# Altium PCB CatTorretPCB.PcbDoc
Units mm, origin at the board's own origin, x right, y up, seen from the top; angles counter-clockwise.
Board outline 42.8 x 38.73 mm, 2 copper layers (Top Layer, Bottom Layer); 15 components, 13 nets, 57 pads, 0 vias.
Unrouted connection lines stored in the file: 30.
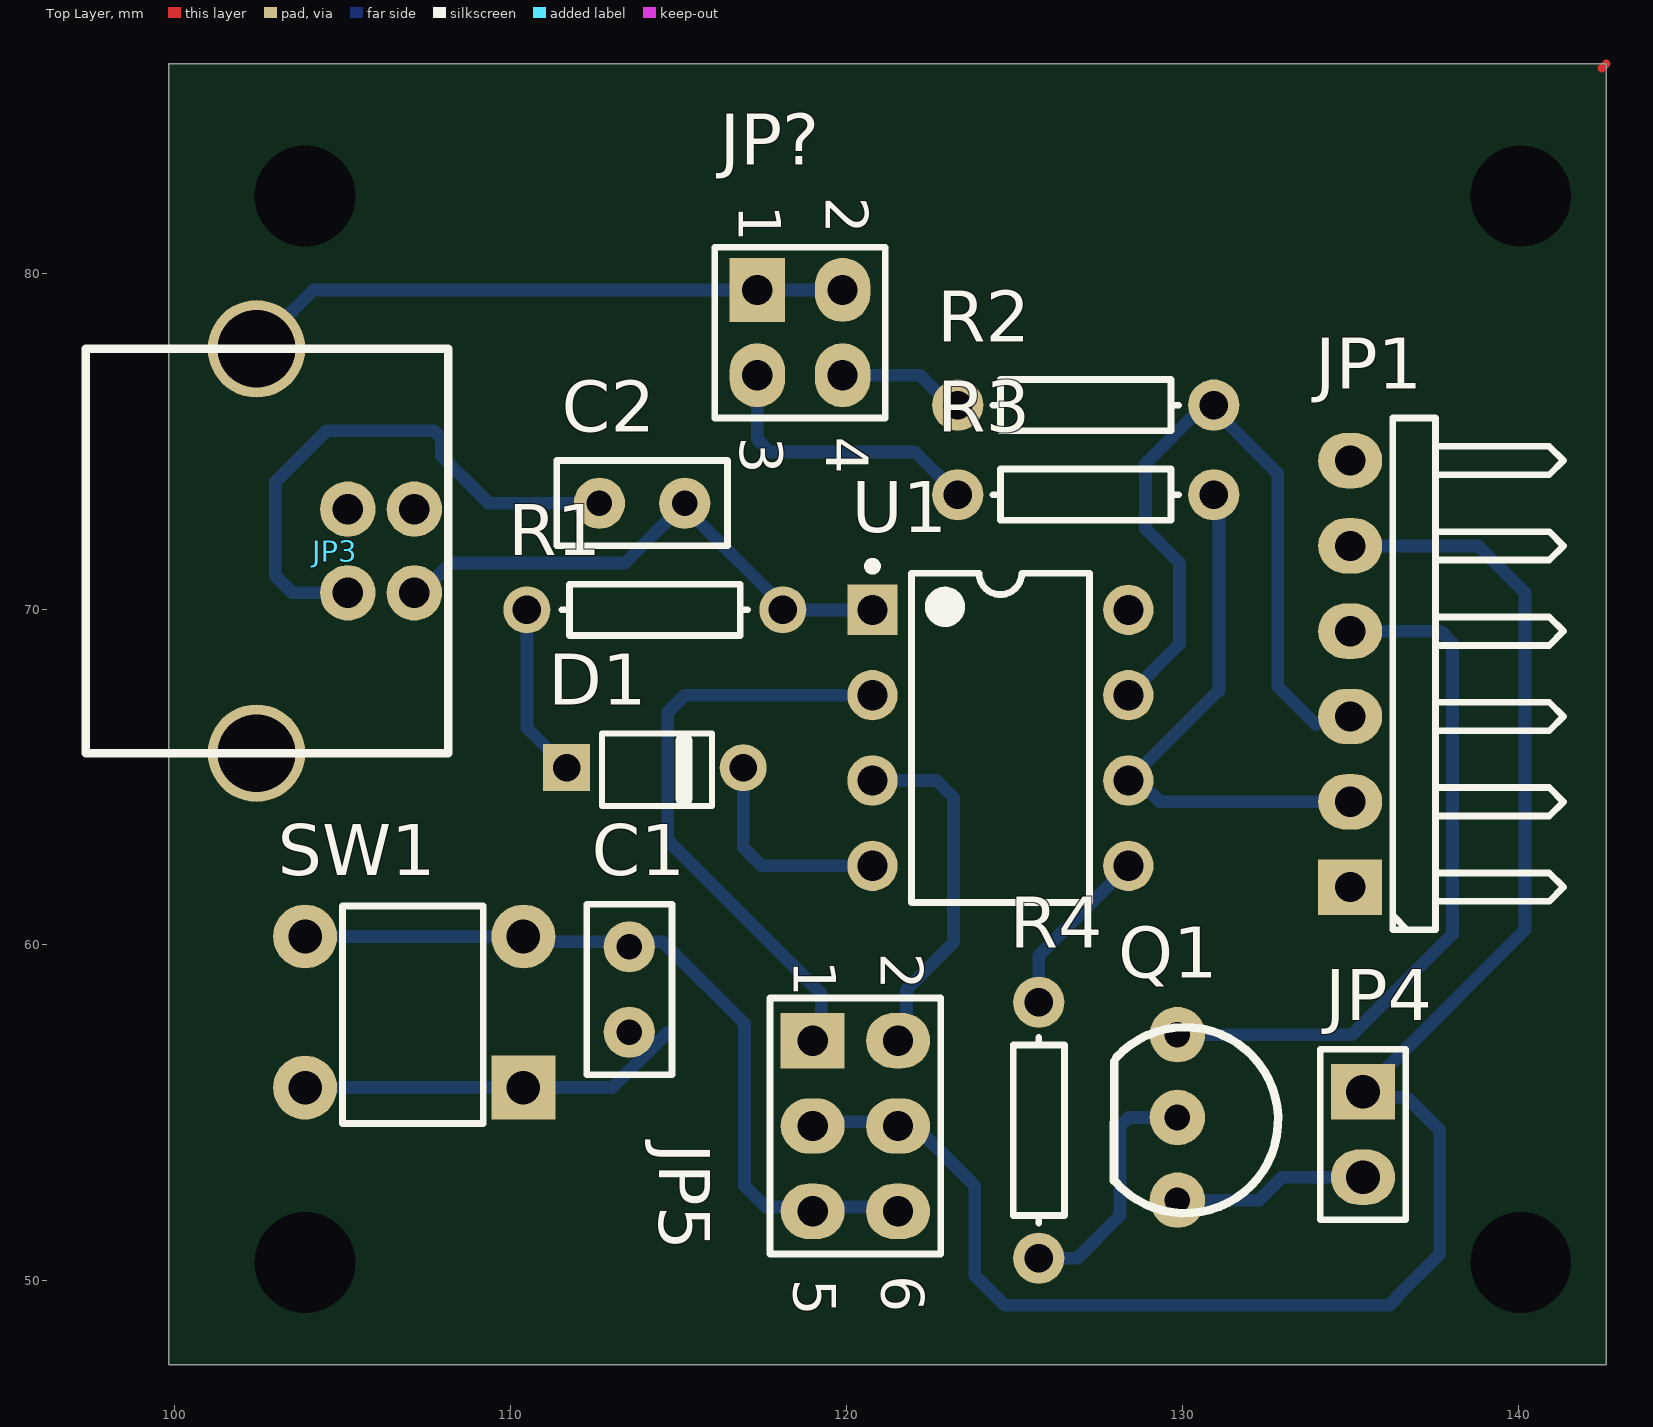
[diagram p0: Top Layer view]
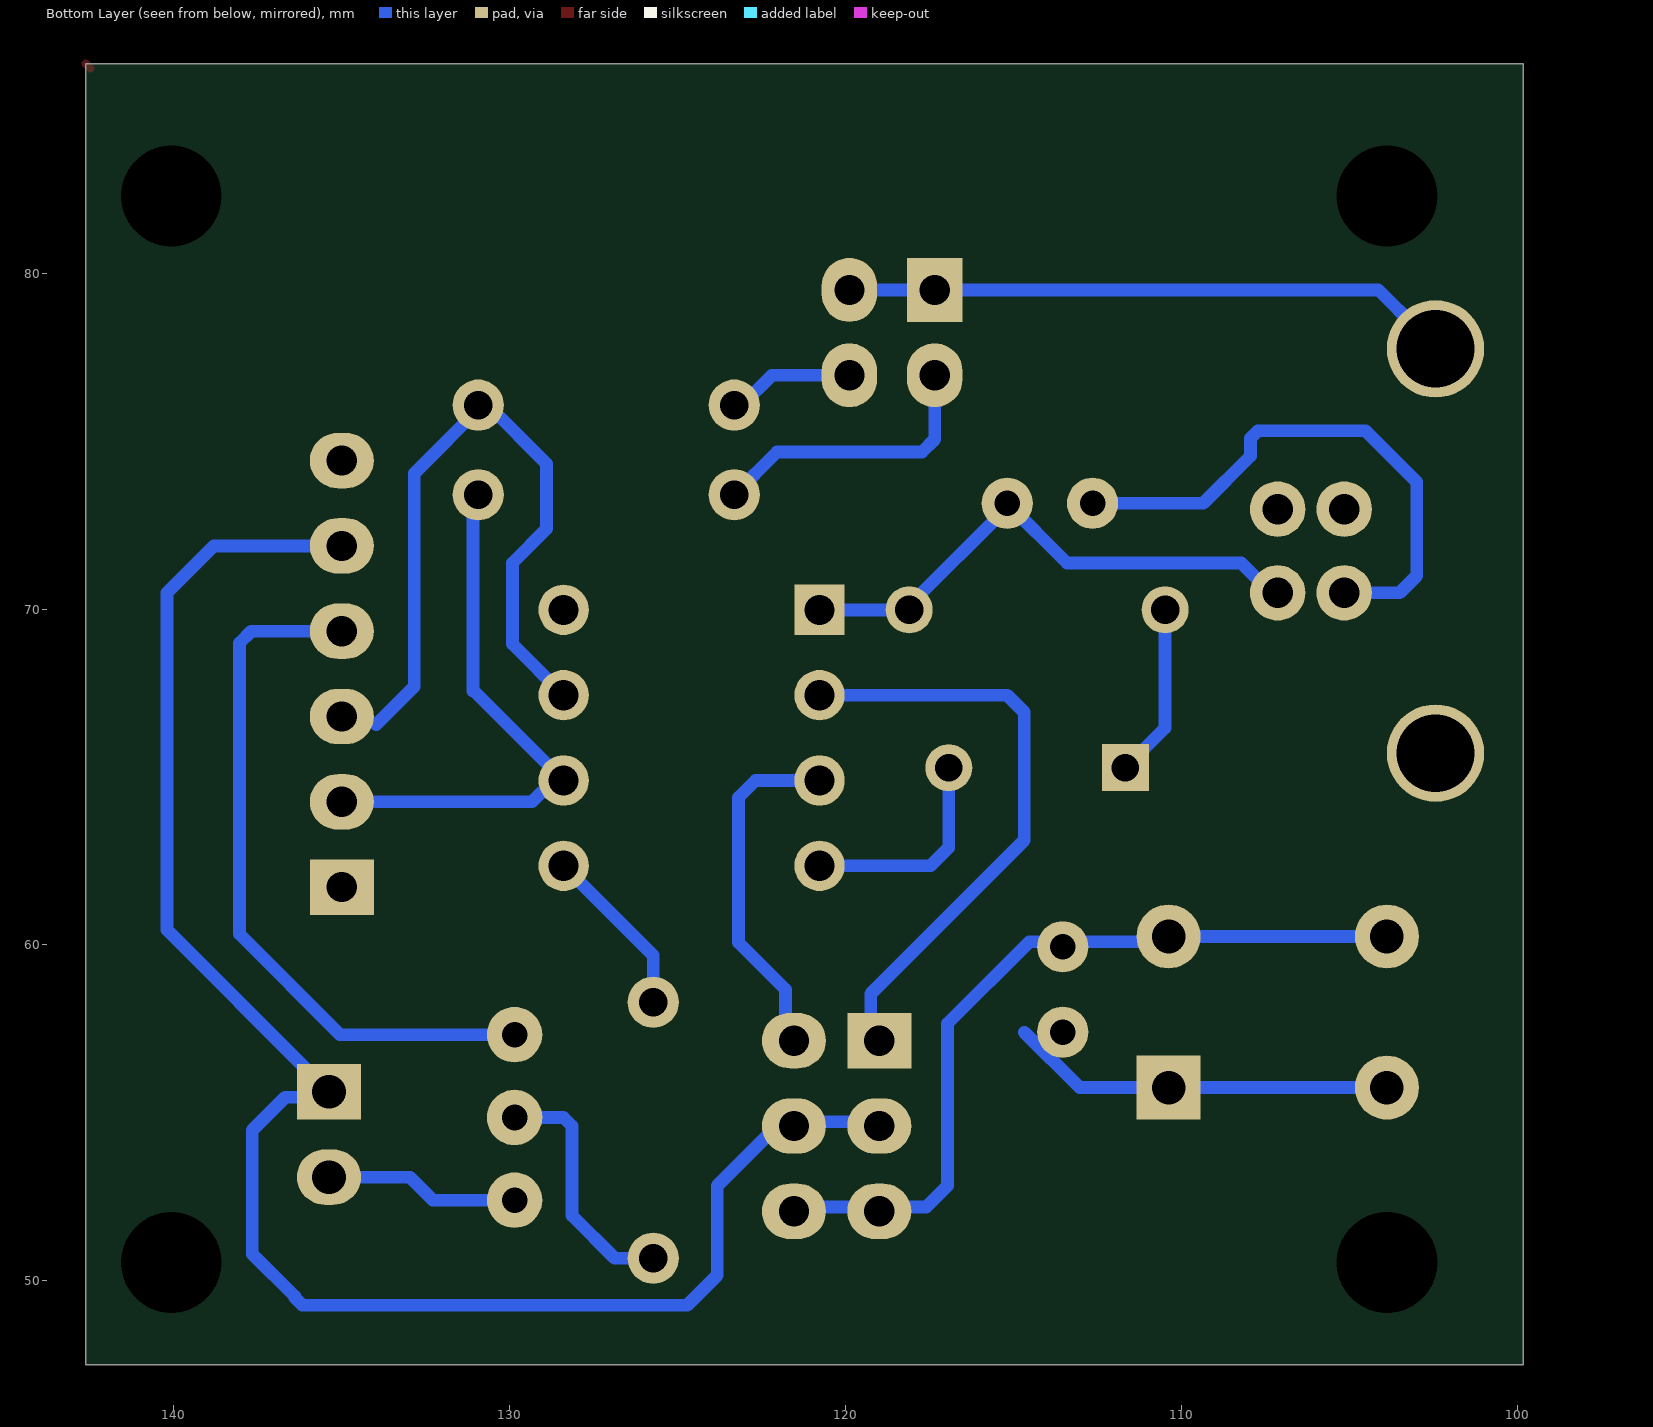
[diagram p1: Bottom Layer view, seen from below]
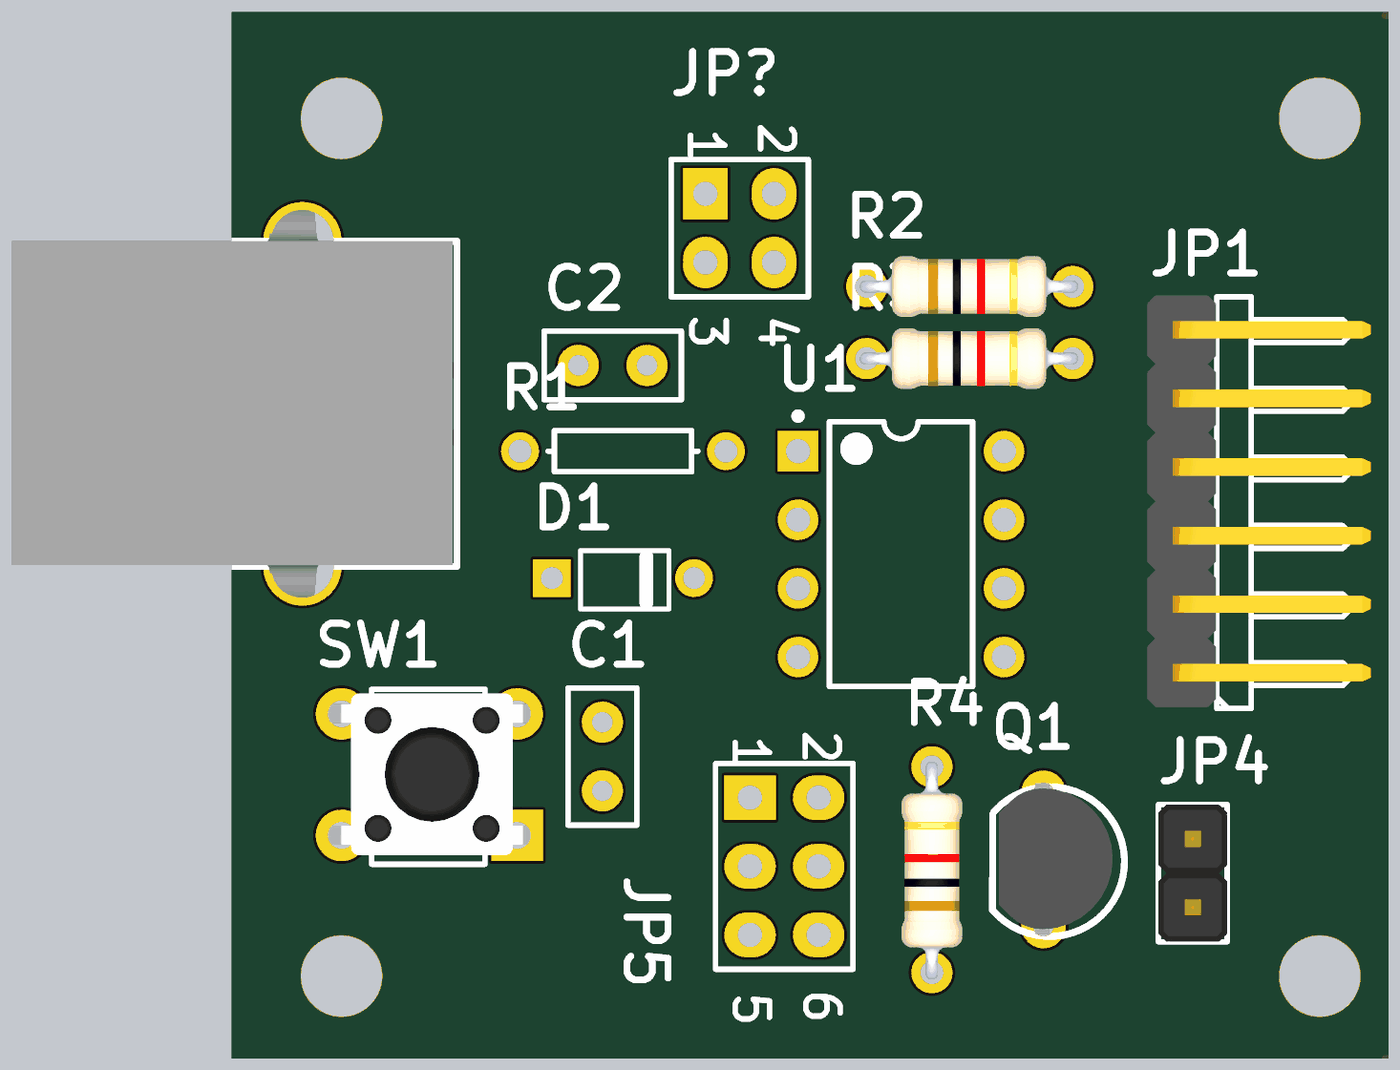
[diagram p2: 3D render of the assembled board from above, using the file's embedded part models]

## Layer stack, top to bottom
Top Solder: solder mask 0.0102, Solder Resist, Dk 3.5
Top Layer: signal copper 0.0356
Dielectric 1: dielectric 0.32, FR-4, Dk 4.8
Bottom Layer: signal copper 0.0356
Bottom Solder: solder mask 0.0102, Solder Resist, Dk 3.5

## Board outline
99.822,47.498 142.621,47.498 142.621,86.233 99.822,86.233

## Design rules (kind name [scope] priority, off if disabled: settings)
Clearance Clearance_Poligon [IsRegion] p1: gap=0.508 ignorepadtopadclearanceinfootprint=FALSE except(0: Arc-Hole Track-Hole SMDPad-Hole THPad-Hole Via-Hole Fill-Hole Poly-Hole Region-Hole Text-Hole)
Clearance [All] p2: gap=0.178 ignorepadtopadclearanceinfootprint=FALSE except(0: Arc-Hole Track-Hole SMDPad-Hole THPad-Hole Via-Hole Fill-Hole Poly-Hole Region-Hole Text-Hole)
PolygonConnect [All] p1: connectstyle=Relief reliefconductorwidth=0.762 reliefentries=4 polygonreliefangle="90 Angle" airgapwidth=0.254
RoutingTopology [All] p1: topology=Horizontal
RoutingVias [All] p1: holewidth=0.711 width=1.651 viastyle="Through Hole" minholewidth=0.711 minwidth=1.27 maxholewidth=0.711 maxwidth=2.032
SolderMaskExpansion [All] p1: expansion=0.102 istentingtop=FALSE
Width [All] p1: maxlimit=1.27 minlimit=0.254 preferedwidth=0.381
29 further rules are at their usual default settings.

## Components (designator, comment, footprint, x,y, rotation, side; value= is the part's Value field where it differs from the comment)
C1 "Cap" "CAP 0.1" 113.538,59.944 r270 top value=0.1uF
C2 "Cap" "CAP 0.1" 112.649,73.152 r0 top value=100pF
D1 "1N4148" DIODE-0.2 114.3,65.278 r0 top
JP1 "ICSP Header" HDR1X6H 135.001,61.722 r90 top
JP3 "USB Connector" USB-B 102.438,77.749 r270 top
JP4 "Header 2" HDR1X2 135.382,55.626 r270 top
JP5 "Header 3X2" HDR2X3 118.999,57.15 r270 top
JP? "Header 2X2" HDR2X2 117.348,79.502 r270 top
Q1 "2N2222" "TO92 Wide legs Normal" 129.857,57.328 r270 top
R1 "Resistor" AXIAL-0.3#1 114.3,69.977 r0 top value=10K
R2 "Res1" AXIAL-0.3#2 130.937,76.073 r180 top value=1K
R3 "Res1" AXIAL-0.3#2 130.937,73.406 r180 top value=1K
R4 "Res1" AXIAL-0.3#2 125.73,58.293 r270 top value=10K
SW1 "Reset" "PUSHBUTTON 6x6mmx8.5mm" 110.386,55.753 r180 top
U1 "PIC12F683-I/P" PDIP300-P8 124.587,66.167 r0 top

## Footprints (in the part's own frame and the unit in brackets; to place one, negate y for a bottom-side part, rotate by r counter-clockwise, add the part's x,y. Pads: shape width x height; smd on the part's side, far side on the other; paste and mask are expansions set on the pad)
AXIAL-0.3#1 [mm] "Axial Device, Thru-Hole; 2 Leads; 0.3 in Pin Spacing"
  round 1.4 hole 0.85: 1(-3.81,0) 2(3.81,0)
  silkscreen extent -2.77,-0.76 2.77,0.76
AXIAL-0.3#2 [mm] "Axial 1/4W resistor"
  round 1.524 hole 0.85: 1(0,0) 2(7.62,0)
  silkscreen extent 1.04,-0.76 6.58,0.76, body extent -0.2,-1.12 7.87,1.13, height 2.57
"CAP 0.1" [mil] "Capcitor ceramico"
  round 60 hole 30: 1(0,0) 2(100,0)
  silkscreen extent -50,-50 150,50, body extent -25,-11 124,9, height 205
DIODE-0.2 [mil] "Diodos pequeños"
  rect 55x55 hole 32: 1(-103.5,0)
  round 55 hole 32: 2(103.5,0)
  silkscreen extent -62,-45 67,40, body extent -114,-34 115,38, height 72
HDR1X2 [mm]
  rect 1.651x1.905 hole 1: 1(0,0)
  oval 1.651x1.905 hole 1: 2(2.54,0)
  silkscreen extent -1.27,-1.27 3.81,1.27, body extent -1.27,-1.27 3.81,1.27, height 8.21
HDR1X6H [mm]
  rect 1.651x1.905 hole 0.9: 1(0,0)
  oval 1.651x1.905 hole 0.9: 2(2.54,0) 3(5.08,0) 4(7.62,0) 5(10.16,0) 6(12.7,0)
  silkscreen extent -1.27,-6.35 13.97,-1.27, body extent -1.22,-6.97 14.02,1.3, height 4.33
HDR2X2 [mm]
  rect 1.905x1.651 hole 0.9: 1(0,0)
  oval 1.905x1.651 hole 0.9: 2(0,2.54) 3(2.54,0) 4(2.54,2.54)
  silkscreen extent -1.27,-1.27 3.81,3.81, body extent -1.27,-1.27 3.81,3.81, height 10.92
HDR2X3 [mm]
  rect 1.651x1.905 hole 0.9: 1(0,0)
  oval 1.651x1.905 hole 0.9: 2(0,2.54) 3(2.54,0) 4(2.54,2.54) 5(5.08,0) 6(5.08,2.54)
  silkscreen extent -1.27,-1.27 6.35,3.81, body extent -1.27,-1.27 6.35,3.81, height 10.92
PDIP300-P8 [mm] "DIP, 8-Leads, Row Spacing 7.62mm, Pitch 2.54mm, Body 9.5x6.6mm"
  rect 1.5x1.5 hole 0.9: 1(-3.81,3.81)
  round 1.5 hole 0.9: 2(-3.81,1.27) 3(-3.81,-1.27) 4(-3.81,-3.81) 5(3.81,-3.81) 6(3.81,-1.27) 7(3.81,1.27) 8(3.81,3.81)
  silkscreen extent -3.93,-4.9 2.65,5.23, body extent -3.55,-4.9 3.55,4.9, height 5.34
"PUSHBUTTON 6x6mmx8.5mm" [mm]
  rect 1.905x1.905 hole 1: 1(0,0)
  round 1.905 hole 1: 1(6.5,0) 2(0,-4.5) 2(6.5,-4.5)
  silkscreen extent 1.19,-5.41 5.38,1.07, body extent -0.75,-5.26 7.05,0.73, height 8.5
"TO92 Wide legs Normal" [mil] "TO92 with wide Legs Normal"
  round 65 hole 30: 1(0,0) 2(97,0) 3(194,0)
  silkscreen extent -9,-74 209,118, body extent -14,-65 206,101, height 394
USB-B [mil]
  round 65 hole 36: 1(286,185) 2(188,185) 3(188,107) 4(286,107)
  round 114.17 hole 91: 5(0,0) 6(474,0)
  silkscreen extent 0,-200 474,225, body extent -56,-423 528,219, height 443

## Part data
C1 C2: "Capacitor", Manufacturer="Generic Components", Class I=Passive, Class II=Capacitor, Published=8-Jun-2000, Publisher="Altium Limited", Revision="July-2002: Re-released for DXP Platform."
D1: library part Diode, "Default Diode", Manufacturer="Generic Components", Class I=Discrete, Class II="Diode - Switching", Published=8-Jun-2000, Publisher="Altium Limited", Revision="July-2002: Re-released for DXP Platform."
JP1: library part "Header 6H", "Header, 6-Pin,  Right Angle", Manufacturer="Generic Components", Class I=Connector, Publisher="Altium Limited", Revision="July-2002: Re-released for DXP Platform."
JP4: "Header, 2-Pin", Manufacturer="Generic Components", Class I=Connector, Publisher="Altium Limited", Revision="July-2002: Re-released for DXP Platform."
JP5: "Header, 3-Pin, Dual row", Manufacturer="Generic Components", Class I=Connector, Publisher="Altium Limited", Revision="July-2002: Re-released for DXP Platform."
JP?: "Header, 2-Pin, Dual row", Manufacturer="Generic Components", Class I=Connector, Publisher="Altium Limited", Revision="July-2002: Re-released for DXP Platform."
Q1: "NPN General Purpose Amplifier", Manufacturer="Generic Components", Package Reference=TO-92A, Class I=Discrete, Class II="BJT - Low Power", Datasheet="Latest Revision: 1997", Published=8-Jun-2000, Publisher="Altium Limited", Revision 1="11-July-2000: SIM Model Added.", Revision 2="July-2002: Re-released for DXP Platform."
R1: library part Res1, Manufacturer="Generic Components", Class I=Passive, Class II=Resistor, Published=8-Jun-2000, Publisher="Altium Limited", Revision="July-2002: Re-released for DXP Platform."
R2 R3 R4: "Resistor", Manufacturer="Generic Components", Class I=Passive, Class II=Resistor, Published=8-Jun-2000, Publisher="Altium Limited", Revision="July-2002: Re-released for DXP Platform."
SW1: library part "PUSH BUTTON NO"
U1: "Flash-Based 8-Bit CMOS Microcontroller with nanoWatt Technology, 2K (x14-Bit words) Program Memory, 384 Bytes Data Memory, 8-Pin PDIP, Industrial Temperature", Supplier Part Number 1=PIC12F683-I/P-ND, Code_JEDEC=MS-001, ComponentLink1Description=Datasheet, ComponentLink1URL=http://ww1.microchip.com/downloads/en/DeviceDoc/41211D_.pdf, ComponentLink2Description="Packaging Specification", ComponentLink2URL=http://www.microchip.com/stellent/groups/techpub_sg/documents/packagingspec/en012702.pdf, ComponentLink3Description="Microchip.com Home", ComponentLink3URL=http://www.microchip.com/, DatasheetVersion="revD, Feb-2007", LatestRevisionDate=02-Dec-2009, LatestRevisionNote="Updated to datasheet revision revD, Feb-2007.", PackageDescription="8-Lead Plastic Dual In-Line (P) - 300 mil Body [PDIP]", PackageReference=PDIP300-P8, PackageVersion="revBB, Aug-2009", Published=29-Jan-2009, Publisher="Altium Limited", Supplier 1=Digi-Key, Supplier 2=Farnell, Supplier 3=Farnell, Supplier Part Number 2=9759034, Supplier Part Number 3=1523923

## Free pads (board coordinates)
  round 2 hole 3: ""(103.886,50.546) ""(103.886,82.296) ""(140.081,50.546) ""(140.081,82.296)

## Nets (pads, with @x,y where several pads share a name; then routed paths per layer and width w, separated by ;. In a path a pad name is that pad's centre, name@x,y a point inside that pad or via, vN(x,y) a via of type N, cw(c..) or ccw(c..) an arc to the next point about the centre after c; other vN are vias at no path point)
+5V: C2.2 JP1.5 JP3.1 JP4.1 JP5.3 JP5.4 R1.2 U1.1 | length 68.2
  Bottom Layer w0.381: JP3.1 107.335,70.485 108.224,71.374 113.411,71.374 C2.2 115.189,73.025 118.11,70.104 R1.2 U1.1 ; JP5.3@119.253,54.737 121.793,54.737 121.92,54.737 123.825,52.832 123.825,50.165 124.714,49.276 136.175,49.276 136.398,49.499 136.398,49.53 137.668,50.8 137.668,54.483 136.683,55.468 136.144,55.468 135.953,55.659 JP4.1@135.953,56.197 ; JP1.5 138.811,71.882 140.208,70.485 140.208,60.452 JP4.1@135.953,56.197 ; JP4.1 JP4.1@135.953,56.197
GND: C1.1 C2.1 JP1.4 JP3.4 JP3.5 JP3.6 JP5.5 JP5.6 JP?.1 JP?.2 Q1.1 SW1.2 U1.8 | length 79.4
  Bottom Layer w0.381: JP3.5@102.997,78.359 104.14,79.502 JP?.1 JP?.2 ; SW1.2@103.886,60.253 110.386,60.253 110.541,60.099 114.526,60.099 116.967,57.658 116.967,52.832 117.602,52.197 119.253,52.197 JP5.6@121.793,52.197 ; JP3.4 103.505,70.485 102.997,70.993 102.997,73.787 104.521,75.311 107.727,75.311 107.95,75.088 107.95,74.554 109.352,73.152 C2.1 ; Q1.1 135.052,57.328 138.049,60.325 138.049,68.992 137.699,69.342 JP1.4
NetC1_2: C1.2 D1.1 R1.1 SW1.1 | length 16.7
  Bottom Layer w0.381: SW1.1@103.886,55.753 110.386,55.753 113.03,55.753 114.681,57.404 ; R1.1 110.49,66.459 D1.1
NetD1_2: D1.2 U1.4 | length 6.4
  Bottom Layer w0.381: D1.2 116.929,62.903 117.475,62.357 U1.4
NetJP1_2: JP1.2 R3.1 U1.6 | length 15.7
  Bottom Layer w0.381: R3.1 131.095,73.248 131.095,67.564 131.064,67.564 U1.6 128.7,64.897 129.335,64.262 JP1.2@134.112,64.262
NetJP1_3: JP1.3 R2.1 U1.7 | length 21.7
  Bottom Layer w0.254: U1.7 128.524,67.437 U1.7@128.651,67.564
  Bottom Layer w0.381: U1.7 129.921,68.961 129.921,71.374 128.905,72.39 128.905,74.326 130.652,76.073 130.81,76.073 132.842,74.041 132.842,67.691 133.973,66.56
NetJP4_2: JP4.2 Q1.3 | length 6.3
  Bottom Layer w0.381: Q1.3 132.283,52.4 132.969,53.086 JP4.2 JP4.2@135.853,53.086
NetJP5_1: JP5.1 U1.2 | length 17.9
  Bottom Layer w0.381: JP5.1@119.253,57.277 119.253,58.547 114.681,63.119 114.681,66.929 115.189,67.437 U1.2
NetJP5_2: JP5.2 U1.3 | length 10.3
  Bottom Layer w0.381: U1.3 122.682,64.897 123.19,64.389 123.19,60.071 121.793,58.674 JP5.2@121.793,57.277
NetJP?_3: JP?.3 R3.2 | length 8.6
  Bottom Layer w0.381: JP?.3 117.348,75.057 117.729,74.676 122.047,74.676 R3.2
NetJP?_4: JP?.4 R2.2 | length 3.7
  Bottom Layer w0.381: JP?.4 122.193,76.962 123.082,76.073 R2.2@123.19,76.073
NetQ1_2: Q1.2 R4.2 | length 7.2
  Bottom Layer w0.381: R4.2@125.984,50.673 126.873,50.673 128.143,51.943 128.143,54.61 128.397,54.864 Q1.2
NetR4_1: R4.1 U1.5 | length 5.3
  Bottom Layer w0.381: R4.1@125.73,58.182 125.73,59.69 U1.5
pads on no net: JP1.1 JP1.6 JP3.2 JP3.3
copper on no net: | length 0.2
  Top Layer w0.254: 142.494,86.106 142.621,86.233

## Dimensions
142.494,86.106 to 142.621,47.498 on Top Layer
100.203,86.487 to 142.621,86.233 on Top Layer

## Text inside footprints (layer, text, board x,y; h text height)
JP5: Top Overlay "1" at 118.44,59.563 h1.27 r270; Top Overlay "2" at 121.031,59.766 h1.27 r270; Top Overlay "5" at 118.44,50.063 h1.27 r270; Top Overlay "6" at 121.056,50.165 h1.27 r270
JP?: Top Overlay "3" at 116.84,75.133 h1.27 r270; Top Overlay "4" at 119.405,75.133 h1.27 r270; Top Overlay "2" at 119.38,82.271 h1.27 r270; Top Overlay "1" at 116.789,82.042 h1.27 r270